# EAGLE board Draft0 (EAGLE 9.3.0)
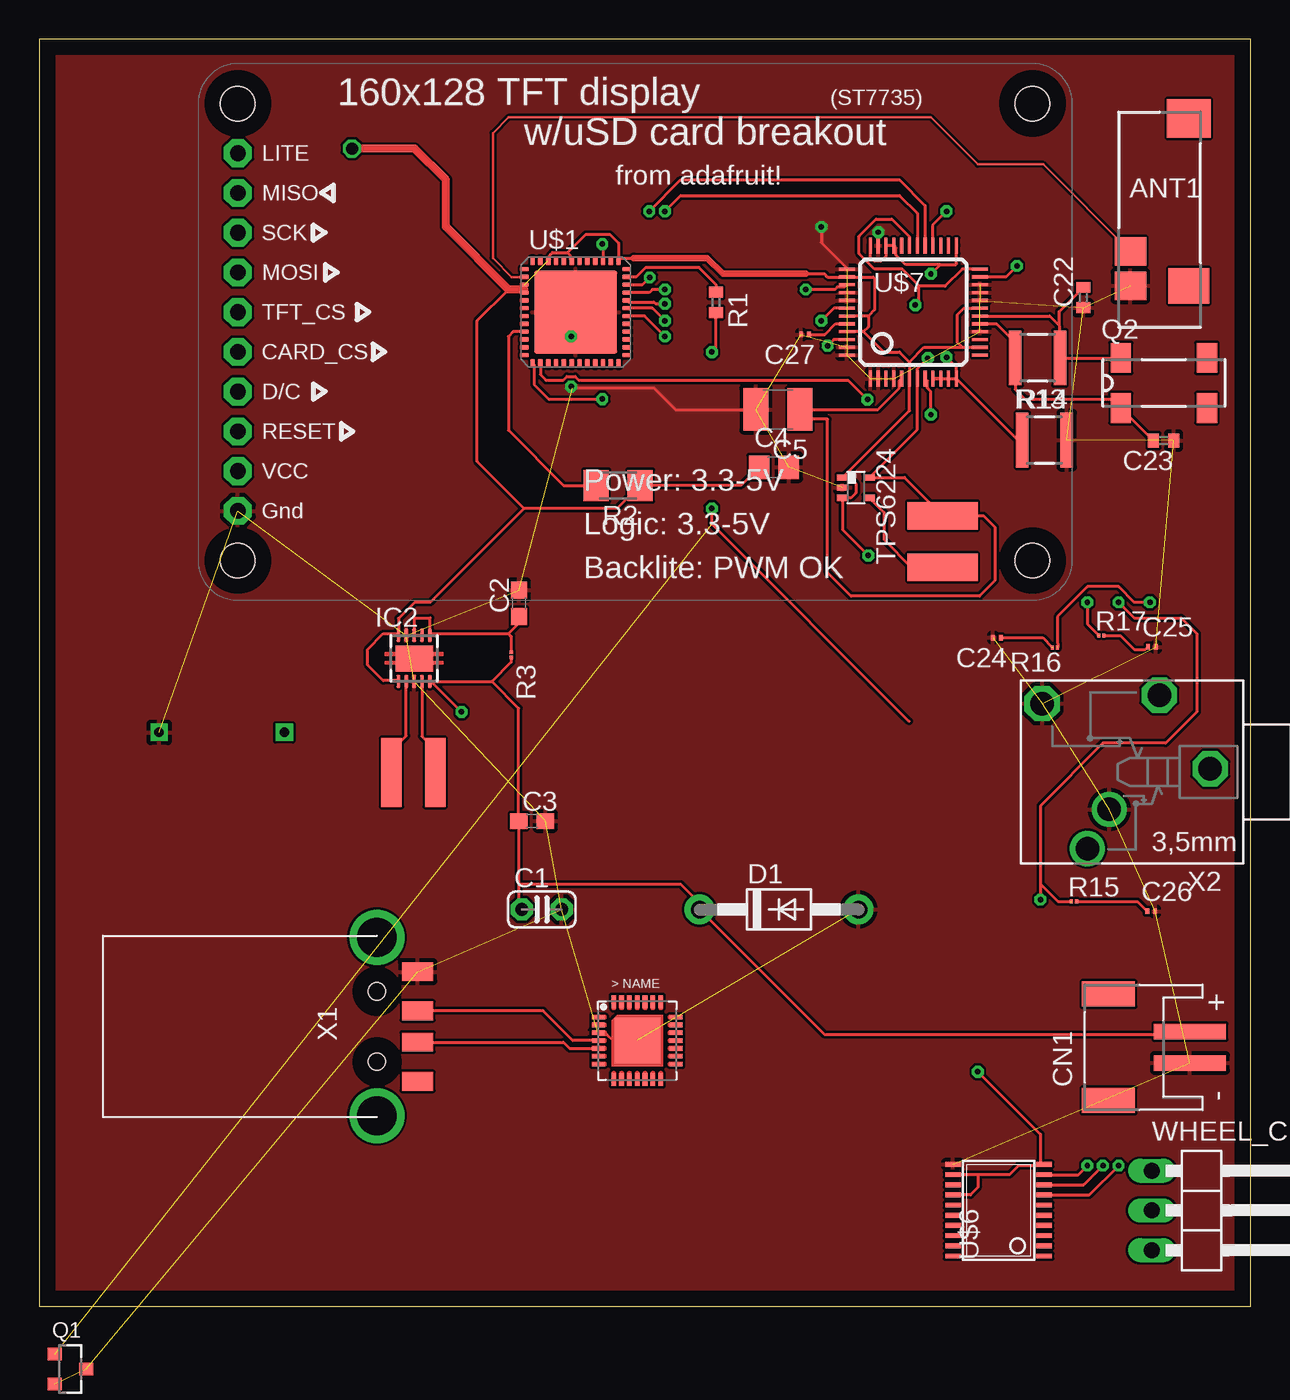
[diagram p0: board, top side]
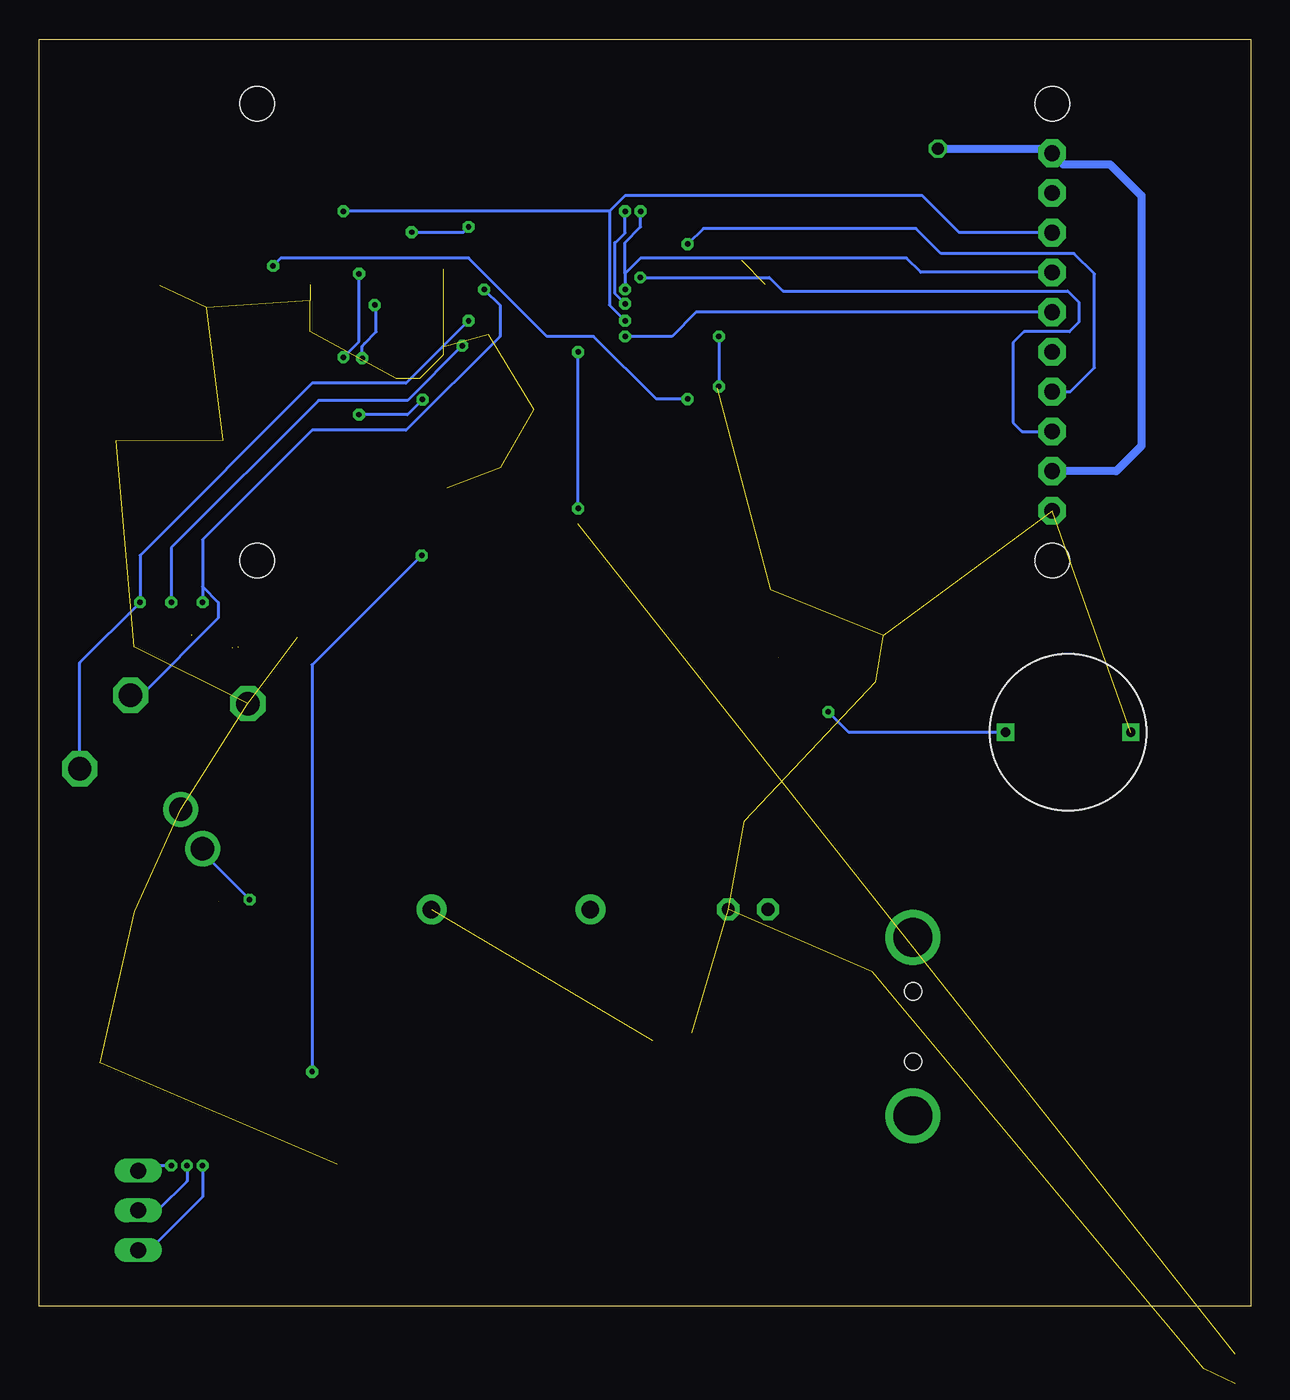
[diagram p1: board, bottom side, seen from below]

Size 77.45 x 81 mm. Coordinates in mm from the lower left corner, seen from the top.
Outline: 0,0 77.45,0 77.45,81 0,81 0,0
Copper layers (1*16): Top 0.035mm / dielectric 1.5mm / Bottom 0.035mm
Design rules "default": minimum track width 6mil, minimum drill 0.35mm, track to track 6mil, track to pad 6mil, pad to pad 6mil, via to via 6mil, smd to smd 6mil, copper to edge 40mil, drill to drill 6mil, minimum pad ring 10mil, minimum via ring 8mil, stop-mask expansion 4mil, vias tented up to drill 0mil, thermal gap 10mil

## Footprints (pad centres in the part's own frame; a part is rotated, then mirrored left to right if it is on the bottom)
PRO-OB-440_1 = smd 2 x 1.8: 1 1.865,-2.65; 2 1.865,-4.85 | smd 2.6 x 2.25: 3 -1.865,-2.65 | smd 2.8 x 2.45: 4 -1.865,-13.35
C025-024X044 = drill 0.813 pad 1.422 octagon: 1 -1.27,0; 2 1.27,0
C0603 = smd 1.1 x 1: 1 -0.85,0; 2 0.85,0
C0805 = smd 1.3 x 1.5: 1 -0.95,0; 2 0.95,0
C1210 = smd 1.6 x 2.7: 1 -1.4,0; 2 1.4,0
C0402 = smd 0.7 x 0.9: 1 -0.65,0; 2 0.65,0
C0201 = smd 0.25 x 0.35: 1 -0.25,0; 2 0.25,0
JST-PH-2-SMT-RA = smd 1 x 4.6: 1 1,-3.7; 2 -1,-3.7 | smd 1.6 x 3.4: NC1 -3.4,1.5; NC2 3.4,1.5
DO41-10 = drill 1.118 pad 1.93: A 5.08,0; C -5.08,0
DRC-S-PVSON-N10 = smd 0.28 x 0.85: 1 -1,-1.475; 2 -0.5,-1.475; 3 0,-1.475; 4 0.5,-1.475; 5 1,-1.475; 6 1,1.475; 7 0.5,1.475; 8 0,1.475; 9 -0.5,1.475; 10 -1,1.475 | smd 2.4 x 1.65: TH 0,0
MINI-MOTOR = drill 0.6 square: GND -4,0; VCC 4,0
ON_SEMI_MMBT5551LT1G_0 = smd 0.9 x 0.8: 1 -1,0.95; 2 -1,-0.95; 3 1,0
MC-306 = smd 1.3 x 1.9: 1 -2.75,-1.6; 2 2.75,-1.6; 3 2.75,1.6; 4 -2.75,1.6
R0402 = smd 0.7 x 0.9: 1 -0.65,0; 2 0.65,0
M1206 = smd 1.6 x 2: 1 -1.4,0; 2 1.4,0
R01005 = smd 0.2 x 0.25: 1 -0.163,0; 2 0.163,0
1812X7R = smd 0.8 x 3.5: 1 -1.425,0; 2 1.425,0
TSP62240 = smd 0.4 x 0.7: 1 -0.65,-0.85; 2 0,-0.85; 3 0.65,-0.85; 4 0.65,0.85; 5 -0.65,0.85
QFN48 = smd 0.55 x 0.3: 1 -3.275,2.75; 2 -3.275,2.25; 3 -3.275,1.75; 4 -3.275,1.25; 5 -3.275,0.75; 6 -3.275,0.25; 7 -3.275,-0.25; 8 -3.275,-0.75; 9 -3.275,-1.25; 10 -3.275,-1.75; 11 -3.275,-2.25; 12 -3.275,-2.75; 25 3.275,-2.75; 26 3.275,-2.25; 27 3.275,-1.75; 28 3.275,-1.25; 29 3.275,-0.75; 30 3.275,-0.25; 31 3.275,0.25; 32 3.275,0.75; 33 3.275,1.25; 34 3.275,1.75; 35 3.275,2.25; 36 3.275,2.75 | smd 0.3 x 0.55: 13 -2.75,-3.275; 14 -2.25,-3.275; 15 -1.75,-3.275; 16 -1.25,-3.275; 17 -0.75,-3.275; 18 -0.25,-3.275; 19 0.25,-3.275; 20 0.75,-3.275; 21 1.25,-3.275; 22 1.75,-3.275; 23 2.25,-3.275; 24 2.75,-3.275; 37 2.75,3.275; 38 2.25,3.275; 39 1.75,3.275; 40 1.25,3.275; 41 0.75,3.275; 42 0.25,3.275; 43 -0.25,3.275; 44 -0.75,3.275; 45 -1.25,3.275; 46 -1.75,3.275; 47 -2.25,3.275; 48 -2.75,3.275 | smd 5.309 x 5.309: EXP 0,0
ADAFRUITST7735R_18 = drill 1 pad 1.778 octagon: CARD_CS -25.4,-1.27; D/C -25.4,-3.81; GND -25.4,-11.43; LITE -25.4,11.43; MISO -25.4,8.89; MOSI -25.4,3.81; RESET -25.4,-6.35; SCK -25.4,6.35; TFT_CS -25.4,1.27; VCC -25.4,-8.89 | hole 2.2: -25.4,14.605; -25.4,-14.605; 25.4,-14.605; 25.4,14.605
INDUCTOR = smd 1.3 x 4.4: P$1 -1.5,0.2; P$2 1.3,0.2
QFN28 = smd 2.9 x 2.9: P$0 0,0 | smd 0.8 x 0.3: P$1 -2.5,1.5; P$2 -2.5,1; P$3 -2.5,0.5; P$4 -2.5,0; P$5 -2.5,-0.5; P$6 -2.5,-1; P$7 -2.5,-1.5; P$15 2.5,-1.5; P$16 2.5,-1; P$17 2.5,-0.5; P$18 2.5,0; P$19 2.5,0.5; P$20 2.5,1; P$21 2.5,1.5 | smd 0.3 x 0.8: P$8 -1.5,-2.5; P$9 -1,-2.5; P$10 -0.5,-2.5; P$11 0,-2.5; P$12 0.5,-2.5; P$13 1,-2.5; P$14 1.5,-2.5; P$22 1.5,2.5; P$23 1,2.5; P$24 0.5,2.5; P$25 0,2.5; P$26 -0.5,2.5; P$27 -1,2.5; P$31 -1.5,2.5
INDUCTOR' = smd 1.75 x 4.5: P$1 -1.4,0.2; P$2 1.9,0.2
TSSOP20 = smd 0.305 x 0.991: 1 -2.925,-2.918; 2 -2.275,-2.918; 3 -1.625,-2.918; 4 -0.975,-2.918; 5 -0.325,-2.918; 6 0.325,-2.918; 7 0.975,-2.918; 8 1.625,-2.918; 9 2.275,-2.918; 10 2.925,-2.918; 11 2.925,2.918; 12 2.275,2.918; 13 1.625,2.918; 14 0.975,2.918; 15 0.325,2.918; 16 -0.325,2.918; 17 -0.975,2.918; 18 -1.625,2.918; 19 -2.275,2.918; 20 -2.925,2.918
LQFP48 = smd 0.2 x 1: 1 -2.75,-4.25; 2 -2.25,-4.25; 3 -1.75,-4.25; 4 -1.25,-4.25; 5 -0.75,-4.25; 6 -0.25,-4.25; 7 0.25,-4.25; 8 0.75,-4.25; 9 1.25,-4.25; 10 1.75,-4.25; 11 2.25,-4.25; 12 2.75,-4.25; 25 2.75,4.25; 26 2.25,4.25; 27 1.75,4.25; 28 1.25,4.25; 29 0.75,4.25; 30 0.25,4.25; 31 -0.25,4.25; 32 -0.75,4.25; 33 -1.25,4.25; 34 -1.75,4.25; 35 -2.25,4.25; 36 -2.75,4.25 | smd 1 x 0.2: 13 4.25,-2.75; 14 4.25,-2.25; 15 4.25,-1.75; 16 4.25,-1.25; 17 4.25,-0.75; 18 4.25,-0.25; 19 4.25,0.25; 20 4.25,0.75; 21 4.25,1.25; 22 4.25,1.75; 23 4.25,2.25; 24 4.25,2.75; 37 -4.25,2.75; 38 -4.25,2.25; 39 -4.25,1.75; 40 -4.25,1.25; 41 -4.25,0.75; 42 -4.25,0.25; 43 -4.25,-0.25; 44 -4.25,-0.75; 45 -4.25,-1.25; 46 -4.25,-1.75; 47 -4.25,-2.25; 48 -4.25,-2.75
1X03/90 = drill 1.016 long: 1 -2.54,-3.81; 2 0,-3.81; 3 2.54,-3.81
MOLEX_480371000 = smd 1.2 x 2: 1 3.5,2.6; 2 1,2.6; 3 -1,2.6; 4 -3.5,2.6 | drill 2.5: M1 -5.7,0; M2 5.7,0 | hole 1.1: -2.25,0; 2.25,0
PG203J = drill 1.499 octagon: 1 -5.004,-0.203; 4 5.74,-4.369; 5 -1.753,-4.902 | drill 1.499: 2 2.845,4.902; 3 1.448,2.388

## Placement (x,y rotation side)
ANT1  PRO-OB-440  [PRO-OB-440_1]  71.62,62.58 180 top
C1  0.1 uF  [C025-024X044]  32.13,25.37 0 top
C2  .1uF  [C0603]  30.68,44.94 90 top
C3  10uF  [C0603]  31.51,31.02 0 top
C4  4.7 uF  [C0805]  46.97,53.64 0 top
C5  10 uF  [C1210]  47.22,57.33 180 top
C22  33pF  [C0402]  66.74,64.48 90 top
C23  33pF  [C0402]  71.87,55.34 180 top
C24  10nF  [C0201]  61.22,42.74 180 top
C25  10nF  [C0201]  71.13,42.16 0 top
C26  47nF  [C0201]  71.08,25.26 0 top
C27  1uF  [C0201]  48.96,62.12 180 top
CN1  [JST-PH-2-SMT-RA]  69.85,16.56 90 top
D1  1N4004  [DO41-10]  47.29,25.37 0 top
IC2  TPS6300  [DRC-S-PVSON-N10]  23.97,41.42 0 top
MOT1  MINI-MOTOR  [MINI-MOTOR]  11.67,36.69 180 bottom
Q1  ON_SEMI_MMBT5551LT1GON_SEMI_MMBT5551LT1G_0_0  [ON_SEMI_MMBT5551LT1G_0]  2,-4 0 top  (outside the outline)
Q2  MC-306  [MC-306]  71.89,59.02 0 top
R1  1K  [R0402]  43.26,64.17 270 top
R2  10K  [M1206]  37.01,52.47 180 top
R3  100  [R01005]  30.18,41.65 270 top
R13  100k  [1812X7R]  64.26,55.37 0 top
R14  1M  [1812X7R]  63.82,60.63 180 top
R15  10  [R01005]  66.15,25.88 0 top
R16  20  [R01005]  64.93,42.12 180 top
R17  20  [R01005]  67.89,42.88 0 top
TPS6224  TPS62240  [TSP62240]  52.21,52.33 270 top
U$1  ESP32-PICO-D4  [QFN48]  34.29,63.55 0 top
U$2  ADAFRUITST7735R_18  [ADAFRUITST7735R_18]  38.1,62.28 0 top
U$3  2.2uH  [INDUCTOR]  23.82,34.33 180 top
U$4  CP2102N-A02-GQFN28  [QFN28]  38.23,16.99 0 top
U$5  CR43NP-2R2MC  [INDUCTOR']  57.95,48.64 90 top
U$6  COMMS-AT42QT2120XU  [TSSOP20]  61.33,6.15 90 top
U$7  VS1053  [LQFP48]  55.88,63.55 0 top
WHEEL_C  [1X03/90]  74.93,6.13 270 top
X1  USB-A  [MOLEX_480371000]  21.59,17.89 270 top
X2  PG203J  [PG203J]  69.85,34.16 180 top

## Library data of the parts
ANT1 = PRO-OB-440; DESCRIPTION: OnBoard SMD 2400 antenna; HEIGHT: mm; MANUFACTURER_NAME: Proant AB; MANUFACTURER_PART_NUMBER: PRO-OB-440
C1 CN1 D1 R1 X1 = adafruit
C2-C5 C22-C27 = rcl; SPICEPREFIX: C
IC2 = texas; MPN: TPS63000DRCTG4; OC_FARNELL: 1511852; OC_NEWARK: 59M7217
MOT1 = Mini-Motor
Q1 = ON Semi - MMBT5551LT1G; 3DS_PART_NUMBER: 452-00001; CENTROID_NOT_SPECIFIED: No; COLLECTOR_BASE_VOLTAGE: 180V; COLLECTOR_EMITTER_BREAKDOWN_VOLTAGE: 160V; COLLECTOR_EMITTER_SATURATION_VOLTAGE: 0.2V; COLLECTOR_EMITTER_VOLTAGE: 160V; DATASHEET: http://www.onsemi.com/pub/Collateral/MMBT5550LT1-D.PDF; DEVICE_CLASS_L1: Discrete Semiconductors; DEVICE_CLASS_L2: Transistors; DEVICE_CLASS_L3: BJTs; DIGIKEY_DESCRIPTION: TRANS NPN 160V 0.6A SOT23; DIGIKEY_PART_NUMBER: MMBT5551LT1GOSCT-ND; EMITTER_BASE_VOLTAGE: 6V; FOOTPRINT_PARAMETERS_1: {"fp_type":"SOT23","params":{"N":{"default":"3","long name":"Number of leads","type":"multichoice","short name":"N"},"A":{"nom":1000000,"long name":"Height","min":890000,"max":1110000,"short name":"A","type":"measurement"},"A1":{"nom":60000,"long name":"Package clearance","min":10000,"max":100000,"short name":"A1","type":"measurement"},"A2":{"nom":940000,"long name":"Package height","min":880000,"max":1010000,"short name":"A2","type":"measurement"},"D":{"nom":2900000,"long name":"Package length","min":2800000,"max":3040000,"short name":"D","type":"measurement"},"E":{"nom":2400000,"long name":"Width /w leads","min":2100000,"max":2640000,"short name":"E","type":"measurement"},"E1":{"nom":1300000,"long name":"Package width","min":1200000,"max":1400000,"short name":"E1","type":"measurement"},"B":{"nom":440000,"long name":"Lead width","min":370000,"max":500000,"short name":"B","type":"measurement"},"C":{"nom":140000,"long name":"Lead thickness","min":80000,"max":200000,"short name":"C","type":"measurement"},"L":{"nom":430000,"long name":"Lead foot length","min":300000,"max":550000,"short name":"L","type":"measurement"},"e":{"nom":950000,"long name":"Lead pitch","min":null,"max":null,"short name":"e","type":"measurement"},"PHI":{"nom":false,"long name":"Lead angle","min":0,"max":10000000,"short name":"PHI","type":"measurement"},"offset x":{"nom":0,"long name":"X Center offset","min":null,"max":null,"short name":"offset x","type":"measurement"},"offset y":{"nom":0,"long name":"Y Center offset","min":null,"max":null,"short name":"offset y","type":"measurement"},"LS":{"default":"Rounded rectangle","long name":"Land shape","type":"multichoice","short name":"LS"},"LS1":{"default":"Rectangle","long name":"Land shape (Pin 1)","type":"multichoice","short name":"LS1"},"solder toe":{"nom":550000,"long name":"Solder fillet (toe)","min":null,"max":null,"short name":"solder toe","type":"fixedmeasurement"},"solder heel":{"nom":450000,"long name":"Solder fillet (heel)","min":null,"max":null,"short name":"solder heel","type":"fixedmeasurement"},"solder side":{"nom":50000,"long name":"Solder fillet (side)","min":null,"max":null,"short name":"solder side","type":"fixedmeasurement"},"courtyard":{"nom":500000,"long name":"Courtyard","min":null,"max":null,"short name":"courtyard","type":"fixedmeasurement"},"SF":{"default":"A","long name":"Packing level","type":"multichoiceparent","short name":"SF","help":"http://support.upverter.com/customer/portal/articles/978783-what-is-a-footprint-packing-level","children":["solder toe","solder heel","solder side","courtyard"]}}}; FOOTPRINT_PARAMETERS_2: {"fp_type":"SOT23","params":{"N":{"default":"3","long name":"Number of leads","type":"multichoice","short name":"N"},"A":{"nom":1000000,"long name":"Height","min":890000,"max":1110000,"short name":"A","type":"measurement"},"A1":{"nom":60000,"long name":"Package clearance","min":10000,"max":100000,"short name":"A1","type":"measurement"},"A2":{"nom":940000,"long name":"Package height","min":880000,"max":1010000,"short name":"A2","type":"measurement"},"D":{"nom":2900000,"long name":"Package length","min":2800000,"max":3040000,"short name":"D","type":"measurement"},"E":{"nom":2400000,"long name":"Width /w leads","min":2100000,"max":2640000,"short name":"E","type":"measurement"},"E1":{"nom":1300000,"long name":"Package width","min":1200000,"max":1400000,"short name":"E1","type":"measurement"},"B":{"nom":440000,"long name":"Lead width","min":370000,"max":500000,"short name":"B","type":"measurement"},"C":{"nom":140000,"long name":"Lead thickness","min":80000,"max":200000,"short name":"C","type":"measurement"},"L":{"nom":430000,"long name":"Lead foot length","min":300000,"max":550000,"short name":"L","type":"measurement"},"e":{"nom":950000,"long name":"Lead pitch","min":null,"max":null,"short name":"e","type":"measurement"},"PHI":{"nom":false,"long name":"Lead angle","min":0,"max":10000000,"short name":"PHI","type":"measurement"},"offset x":{"nom":0,"long name":"X Center offset","min":null,"max":null,"short name":"offset x","type":"measurement"},"offset y":{"nom":0,"long name":"Y Center offset","min":null,"max":null,"short name":"offset y","type":"measurement"},"LS":{"default":"Rounded rectangle","long name":"Land shape","type":"multichoice","short name":"LS"},"LS1":{"default":"Rectangle","long name":"Land shape (Pin 1)","type":"multichoice","short name":"LS1"},"solder toe":{"nom":350000,"long name":"Solder fillet (toe)","min":null,"max":null,"short name":"solder toe","type":"fixedmeasurement"},"solder heel":{"nom":350000,"long name":"Solder fillet (heel)","min":null,"max":null,"short name":"solder heel","type":"fixedmeasurement"},"solder side":{"nom":30000,"long name":"Solder fillet (side)","min":null,"max":null,"short name":"solder side","type":"fixedmeasurement"},"courtyard":{"nom":250000,"long name":"Courtyard","min":null,"max":null,"short name":"courtyard","type":"fixedmeasurement"},"SF":{"default":"B","long name":"Packing level","type":"multichoiceparent","short name":"SF","help":"http://support.upverter.com/customer/portal/articles/978783-what-is-a-footprint-packing-level","children":["solder toe","solder heel","solder side","courtyard"]}}}; FOOTPRINT_PARAMETERS_3: {"fp_type":"SOT23","params":{"N":{"default":"3","long name":"Number of leads","type":"multichoice","short name":"N"},"A":{"nom":1000000,"long name":"Height","min":890000,"max":1110000,"short name":"A","type":"measurement"},"A1":{"nom":60000,"long name":"Package clearance","min":10000,"max":100000,"short name":"A1","type":"measurement"},"A2":{"nom":940000,"long name":"Package height","min":880000,"max":1010000,"short name":"A2","type":"measurement"},"D":{"nom":2900000,"long name":"Package length","min":2800000,"max":3040000,"short name":"D","type":"measurement"},"E":{"nom":2400000,"long name":"Width /w leads","min":2100000,"max":2640000,"short name":"E","type":"measurement"},"E1":{"nom":1300000,"long name":"Package width","min":1200000,"max":1400000,"short name":"E1","type":"measurement"},"B":{"nom":440000,"long name":"Lead width","min":370000,"max":500000,"short name":"B","type":"measurement"},"C":{"nom":140000,"long name":"Lead thickness","min":80000,"max":200000,"short name":"C","type":"measurement"},"L":{"nom":430000,"long name":"Lead foot length","min":300000,"max":550000,"short name":"L","type":"measurement"},"e":{"nom":950000,"long name":"Lead pitch","min":null,"max":null,"short name":"e","type":"measurement"},"PHI":{"nom":false,"long name":"Lead angle","min":0,"max":10000000,"short name":"PHI","type":"measurement"},"offset x":{"nom":0,"long name":"X Center offset","min":null,"max":null,"short name":"offset x","type":"measurement"},"offset y":{"nom":0,"long name":"Y Center offset","min":null,"max":null,"short name":"offset y","type":"measurement"},"LS":{"default":"Rounded rectangle","long name":"Land shape","type":"multichoice","short name":"LS"},"LS1":{"default":"Rectangle","long name":"Land shape (Pin 1)","type":"multichoice","short name":"LS1"},"solder toe":{"nom":150000,"long name":"Solder fillet (toe)","min":null,"max":null,"short name":"solder toe","type":"fixedmeasurement"},"solder heel":{"nom":250000,"long name":"Solder fillet (heel)","min":null,"max":null,"short name":"solder heel","type":"fixedmeasurement"},"solder side":{"nom":10000,"long name":"Solder fillet (side)","min":null,"max":null,"short name":"solder side","type":"fixedmeasurement"},"courtyard":{"nom":100000,"long name":"Courtyard","min":null,"max":null,"short name":"courtyard","type":"fixedmeasurement"},"SF":{"default":"C","long name":"Packing level","type":"multichoiceparent","short name":"SF","help":"http://support.upverter.com/customer/portal/articles/978783-what-is-a-footprint-packing-level","children":["solder toe","solder heel","solder side","courtyard"]}}}; FOOTPRINT_URL: http://www.onsemi.com/pub/Collateral/318-08.PDF; FOOTPRINT_VARIANT_NAME_0: Recommended_Land_Pattern; FOOTPRINT_VARIANT_NAME_1: IPC_A; FOOTPRINT_VARIANT_NAME_2: IPC_B; FOOTPRINT_VARIANT_NAME_3: IPC_C; HEIGHT: 1.11mm; HFE_MIN: 80; IPC_LAND_PATTERN_NAME: SOT95P240X100-3; LEAD_FREE: yes; MAX_COLLECTOR_CURRENT: 600mA; MAX_JUNCTION_TEMP: +150°C; MF: ON Semi; MFG_PACKAGE_IDENT: 318-08; MFG_PACKAGE_IDENT_DATE: 01/2018; MFG_PACKAGE_IDENT_REV: AS; MOUSER_PART_NUMBER: 863-MMBT5551LT1G; MPN: MMBT5551LT1G; NUMBER_OF_ELEMENTS: 1; NUMBER_OF_NPN: 1; NUMBER_OF_PNP: 0; PACKAGE: SOT-23 (TO-236); POWER_DISSIPATION: 225mW; PREFIX: Q; ROHS: yes; STANDOFF_HEIGHT: 0.01mm; TEMPERATURE_RANGE_HIGH: +150°C; TEMPERATURE_RANGE_LOW: -55°C; VERIFICATION_VERSION: 0.0.0.1
Q2 = crystal; MPN: MC-306 60.0KHZ 100PPM ,12.5PF; OC_FARNELL: 1278040; OC_NEWARK: 31M5576
R2 = resistor
R3 R13-R17 = rcl; SPICEPREFIX: R
TPS6224 = TPS62240
U$1 = ESP32
U$2 = AdafruitST7735R_18
U$3 = VLF4012
U$4 = CP2102N-A02-GQFN28
U$5 = CR43NP-4R7MC
U$6 = AT42QT2120
U$7 = VS1053
WHEEL_C = pinhead
X2 = con-hirschmann; OC_FARNELL: unknown; OC_NEWARK: unknown

## Nets
DISPLAY_CS: U$1.30 U$2.TFT_CS
DISPLAY_DC: U$1.39 U$2.D/C
DISPLAY_RST: U$1.34 U$2.RESET
GND: ANT1.1 C1.2 C2.2 C3.2 C4.2 C5.2 C22.1 C23.1 C24.2 C25.2 C26.2 C27.2 CN1.2 D1.A IC2.3 IC2.9 MOT1.GND Q1.2 Q1.3 R13.2 TPS6224.2 U$1.EXP U$2.GND U$4.P$0 U$4.P$3 U$6.11 U$7.1 U$7.2 U$7.4 U$7.16 U$7.20 U$7.21 U$7.22 U$7.35 U$7.37 U$7.40 U$7.41 U$7.47 U$7.48 X1.4 X2.3 X2.4
IO18: R1.1 U$1.35
N$1: U$1.1
N$2: Q1.1 R1.2
N$3: C2.1 IC2.6 IC2.7 IC2.8 R3.1
N$4: C23.2 Q2.1 R14.2 U$7.17
N$5: R2.2 U$1.9
N$6: IC2.2 U$3.P$2
N$7: ANT1.2 U$1.2
N$8: IC2.4 U$3.P$1
N$10: TPS6224.4 U$5.P$1
N$11: U$4.P$4 X1.3
N$12: U$4.P$5 X1.2
N$25: U$6.9 WHEEL_C.3
N$26: U$6.8 WHEEL_C.2
N$27: U$6.7 WHEEL_C.1
N$30: R13.1 U$7.9 U$7.10 U$7.11 U$7.12 U$7.25 U$7.33 U$7.34 U$7.36
N$31: C22.2 Q2.4 R14.1 U$7.18
N$33: R15.1 U$7.46 X2.2
N$34: R16.1 U$7.42 X2.1
N$35: R17.1 U$7.39 X2.5
N$36: C26.1 R15.2
N$37: C24.1 R16.2
N$38: C25.1 R17.2
N$39: C27.1 U$7.44
SPI_CLK: U$1.31 U$2.SCK U$7.28
SPI_MISO: U$1.32 U$7.30
SPI_MOSI: U$1.33 U$2.MOSI U$7.29
V1P8: C5.1 TPS6224.5 U$5.P$2 U$7.5 U$7.7 U$7.24 U$7.31
V3P3: C4.1 IC2.1 IC2.10 R2.1 TPS6224.1 TPS6224.3 U$1.3 U$1.4 U$1.37 U$1.43 U$1.46 U$2.LITE U$2.VCC U$6.10 U$6.12 U$6.14 U$7.6 U$7.14 U$7.19 U$7.38 U$7.43 U$7.45
VBAT: C1.1 C3.1 CN1.1 D1.C IC2.5 MOT1.VCC R3.2
VBUS: X1.1
VDD: U$4.P$6
VDD3P3_RTC: U$1.19
VDD_SDIO: U$1.26
VREGIN: U$4.P$7
VS1053_CS: U$1.13 U$7.23
VS1053_DREQ: U$1.14 U$7.8

## Tracks (layer width: path | path; a pad name or v marks a point on that pad's centre or on a via)
DISPLAY_CS  (via drill 0.35)
  Top 0.2: v40,62 38.7,63.3 U$1.30
  Bottom 0.2: U$2.TFT_CS 35.45,63.55 37,62 v40,62
DISPLAY_DC  (via drill 0.35)
  Top 0.2: v36,67.9 36.04,67.86 U$1.39
  Bottom 0.2: U$2.D/C 11.53,58.47 10,60 10,66 11.3,67.3 19.8,67.3 21.4,68.9 35,68.9 v36,67.9
DISPLAY_RST  (via drill 0.35)
  Top 0.2: U$1.34 38.56,65.3 v39.03,65.77
  Bottom 0.2: v39.03,65.77 30.77,65.77 29.9,64.9 11.7,64.9 11,64.2 11,62.9 11.6,62.3 14.5,62.3 15.2,61.6 15.2,56.5 14.63,55.93 U$2.RESET
GND  (via drill 0.35)  (38 unrouted)
  Top 0.2: U$1.EXP 34.29,62.29 v34,62 | v34,58.8 34.1,58.7 39.3,58.7 40.67,57.33 C5.2 | U$7.35 v53.64,68.66 | v50,69 50,68 51.63,66.37 U$7.37 | U$4.P$3 35.83,17.39 36.27,17.39 36.67,16.99 U$4.P$0
  Bottom 0.2: v34,62 v34,58.8 | v53.64,68.66 50.34,68.66 v50,69
  pour Top: 0,81 77.4,81 77.4,0 0,0
IO18
  Top 0.2: U$1.35 38.16,65.8 38.77,66.4 42.18,66.4 43.26,65.32 R1.1
N$2  (via drill 0.35)  (1 unrouted)
  Top 0.2: 55.61,37.39 43,50 v43,51 | v43,61 43.26,61.26 R1.2
  Bottom 0.2: v43,51 v43,61
N$3
  Top 0.2: IC2.7 IC2.8 24,42.92 24,44 25,44 24.97,43.97 IC2.6 25.07,43 30,43 | 30,43 30.68,43.68 C2.1 | 30,43 30.18,42.82 30.18,42 30.18,41.84 R3.1
N$4
  Top 0.2: U$7.17 61.2,62.8 62.4,61.61 R14.2 62.4,58.61 63,58 68.56,58 Q2.1 C23.2
N$5
  Top 0.2: U$1.9 30.3,62.3 30,62 30,56 33.53,52.47 R2.2
N$6
  Top 0.2: IC2.2 23.47,36.47 22.52,35.52 U$3.P$2
N$7
  Top 0.152: ANT1.2 64.19,73 60,73 57,76 30,76 29,75 29,67 30.2,65.8 U$1.2
N$8
  Top 0.2: IC2.4 24.47,36.43 25.32,35.58 U$3.P$1
N$10
  Top 0.2: TPS6224.4 54,50.74 54,49 55.76,47.24 U$5.P$1
N$11
  Top 0.2: U$4.P$4 34.11,16.99 32.21,18.89 X1.3
N$12
  Top 0.2: 24.19,16.49 X1.2 33.51,16.89 33.91,16.49 U$4.P$5
N$25  (via drill 0.35)
  Top 0.2: U$6.9 66.42,8.43 v67,9
  Bottom 0.2: v67,9 67,7 70.41,3.59 WHEEL_C.3
N$26  (via drill 0.35)
  Top 0.2: U$6.8 66.78,7.77 v68,9
  Bottom 0.2: v68,9 68,8 69.87,6.13 WHEEL_C.2
N$27  (via drill 0.35)
  Top 0.2: U$6.7 67.12,7.12 v69,9
  Bottom 0.2: v69,9 70.79,9 WHEEL_C.1
N$30  (via drill 0.35)
  Top 0.2: U$7.12 U$7.9 U$7.10 | U$7.12 58.63,60.04 v58,60.67 | v57,66 57.6,66.6 | 57.6,66.6 58.6,66.6 58.63,66.63 U$7.25 | 57.6,66.6 55.37,66.6 54.78,67.19 54.78,67.65 U$7.33 U$7.34 54.13,67.13 53.8,66.8 53.4,66.8 53.13,67.07 U$7.36 | U$7.11 U$7.12 | U$7.12 62.56,55.37 R13.1
  Bottom 0.2: v58,60.67 57,61.67 v57,66
N$31
  Top 0.2: U$7.18 64.6,63.3 65.2,62.7 | 65.2,62.7 65.2,62 65.2,60.67 R14.1 Q2.4 | 65.2,62.7 65.2,63.59 C22.2
N$33  (via drill 0.35)  (1 unrouted)
  Top 0.2: U$7.46 50.8,61.8 v50.4,61.4 | v69,45 70,44 73,44 74,43 74,38 72,36 68,36 64,32 64,27 | 64,27 v64,26 | 64,27 65.12,25.88 65.96,25.88
  Bottom 0.2: v50.4,61.4 53.9,57.9 59.6,57.9 69,48.5 v69,45 | v64,26 67,29.01 X2.2
N$34  (via drill 0.35)  (1 unrouted)
  Top 0.2: U$7.42 50.8,63.8 v50,63 | v71,45 70,45 69,46 67,46 65.09,44.09 65.09,42.38 65.12,42.35 65.12,42.12
  Bottom 0.2: v50,63 54,59 60,59 71,48 v71,45 74.85,41.15 X2.1
N$35  (via drill 0.35)  (1 unrouted)
  Top 0.2: U$7.39 51.48,65.15 51.02,65.15 50.87,65 v49,65 | v67,45 67,43.61 67.7,42.91 67.7,42.88
  Bottom 0.2: v49,65 48,64 48,62 54,56 60,56 67,49 67,46 | 67,46 v67,45 | 67,46 66,45 66,44 70.94,39.06 X2.5
N$36
  Top 0.2: R15.2 70.21,25.88 C26.1
N$37  (1 unrouted)
  Top 0.2: C24.1 64.15,42.74 64.74,42.15 64.74,42.12
N$38
  Top 0.2: R17.2 69.12,42.88 70,42 70.72,42 C25.1
N$39
  Top 0.2: C27.1 50.22,62.12 50.9,62.8 U$7.44
SPI_CLK  (via drill 0.35)
  Top 0.2: v40,63 39.2,63.8 U$1.31 | v58,70 57.1,69.1 57.1,67.83 U$7.28
  Bottom 0.2: U$2.SCK 18.63,68.63 21,71 40,71 41,70 | 41,70 41,64 v40,63 | 41,70 v58,70
SPI_MISO  (via drill 0.35)
  Top 0.2: U$1.32 37.66,64.2 39.3,64.2 39.41,64.09 v40,64.09 | v40,70 41,71 55,71 56.13,69.87 U$7.30
  Bottom 0.2: v40,64.09 40.65,64.74 40.65,68 40.6,68 40,68.6 v40,70
SPI_MOSI  (via drill 0.35)
  Top 0.2: v40,65 39.2,65 39,64.8 U$1.33 | v39,70 41,72 55,72 56.63,70.37 U$7.29
  Bottom 0.2: U$2.MOSI 21.09,66.09 22,67 39,67 40,66 | 40,66 v40,65 | 40,66 40,68 39,69 v39,70
V1P8  (via drill 0.35)
  Top 0.2: U$7.24 59,66.3 57.9,65.2 56.27,65.2 56.24,65.24 | 56.24,65.24 55.17,66.3 53.4,66.3 52.4,67.3 52.4,68.4 53.5,69.5 54.5,69.5 55.63,68.37 U$7.31 | U$7.5 54.98,59.15 54.98,58.69 53.62,57.33 C5.1 49.25,56.7 50.4,56.7 50.4,46.9 51.9,45.4 60.1,45.4 61.1,46.4 61.1,49.8 60.36,50.54 U$5.P$2 55.31,52.98 TPS6224.5 56.13,56.05 U$7.7 56.13,59.93 v56.8,60.6 | v56,64 56.24,64.24 56.24,65.24
  Bottom 0.2: v56.8,60.6 56.8,61.37 56.65,61.52 56.65,61.55 55.9,62.3 55.9,63.9 v56,64
V3P3  (via drill 0.35, 0.75)  (1 unrouted)
  Top 0.152: U$1.3 31.02,65 U$1.4
  Top 0.2: 33.77,67.35 33.94,67.18 33.94,66.92 U$1.43 | U$1.46 32.64,66.92 32.64,67.18 32.81,67.35 33.77,67.35 | 33.77,67.35 34.95,68.53 36.47,68.53 37.04,67.96 U$1.37 37.22,67 38,67 | 49,66 50.2,66 50.4,65.8 U$7.38 53.3,65.8 53.4,65.7 53.4,63.7 53,63.3 | 53,63.3 U$7.43 | 53,63.3 53,62.6 52.7,62.3 | 52.7,62.3 U$7.45 | 52.7,62.3 54,61 55,61 55.63,60.37 | 55.63,60.37 U$7.6 55.63,57.25 TPS6224.1 51.82,52.98 52.2,52.6 52.2,52 51.88,51.68 TPS6224.3 51.36,49.64 v53,48 | 55.63,60.37 56.56,61.3 59,61.3 | 59,61.3 U$7.14 | 59,61.3 58.7,61.6 58.7,63.4 59.1,63.8 U$7.19 | C4.1 44.85,52.47 R2.1 36.94,51 31,51 | 31,51 28,54 28,63 30,65 | 22.97,43 22.97,43.97 24,45 25,45 31,51 | 22.97,43 IC2.10 | IC2.1 22.91,40 22,40 21,41 21,42 22,43 22.97,43 | U$6.10 64.17,9 64,9 | 60,8.43 62.02,8.43 62.6,9 64,9 | 60,8.43 U$6.12 | 60,8.43 60,7.6 59.52,7.12 U$6.14 | v60,15 64,11 64,9
  Top 0.406: 38,67 42.7,67 43.7,66 49,66
  Top 0.508: 31.02,65 30,65 26,69 26,72 24,74 v20,74
  Bottom 0.2: v53,48 60,41 v60,15
  Bottom 0.508: v20,74 12.99,74 U$2.LITE 11.99,73 9,73 7,71 7,55 8.61,53.39 U$2.VCC
VBAT  (via drill 0.35)  (1 unrouted)
  Top 0.2: 25.05,39.95 28.95,39.95 | 30.18,41.46 30.18,41.18 28.95,39.95 | v27,38 25.05,39.95 | 25.05,39.95 IC2.5 | 28.95,39.95 30.66,38.23 C3.1 30.66,27 | 30.66,27 30.66,25.57 C1.1 | 30.66,27 41,27 42.21,25.79 D1.C 50.18,17.4 73.71,17.4 | 74.4,17.4 73.71,17.4 | 73.71,17.4 CN1.1
  Bottom 0.2: MOT1.VCC 25.69,36.69 v27,38
VS1053_CS  (via drill 0.35)
  Top 0.2: U$1.13 31.64,60.18 31.64,58.92 32.56,58 v36,58 | v62.5,66.5 61.8,65.8 U$7.23
  Bottom 0.2: v36,58 38,58 42,62 45,62 50,67 62,67 v62.5,66.5
VS1053_DREQ  (via drill 0.35)
  Top 0.2: U$1.14 32.04,59.56 32.4,59.2 33.51,59.2 33.74,59.43 34.26,59.43 34.49,59.2 51.71,59.2 v52.95,57.96 | U$7.8 56.78,59.15 56.78,58.69 57,58.47 v57,57
  Bottom 0.2: v52.95,57.96 53.91,57 v57,57